# Altium PCB E-pico.PcbDoc
Units mil, origin at the board's own origin, x right, y up, seen from the top; angles counter-clockwise.
Board outline 2065 x 820 mil, 2 copper layers (Top Layer, Bottom Layer); 31 components, 39 nets, 175 pads, 47 vias.
Unrouted connection lines stored in the file: 34.
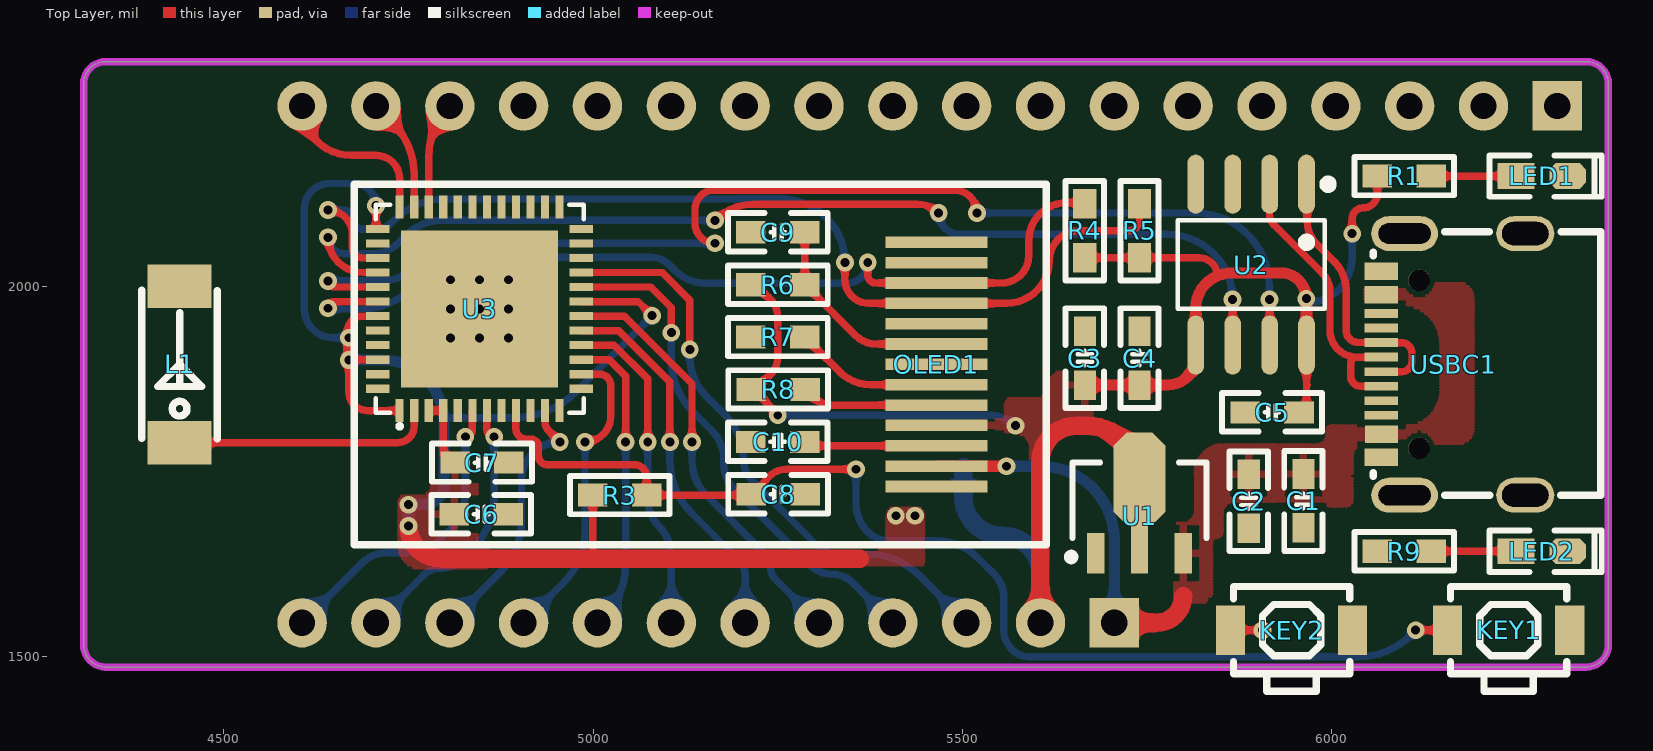
[diagram p0: Top Layer view]
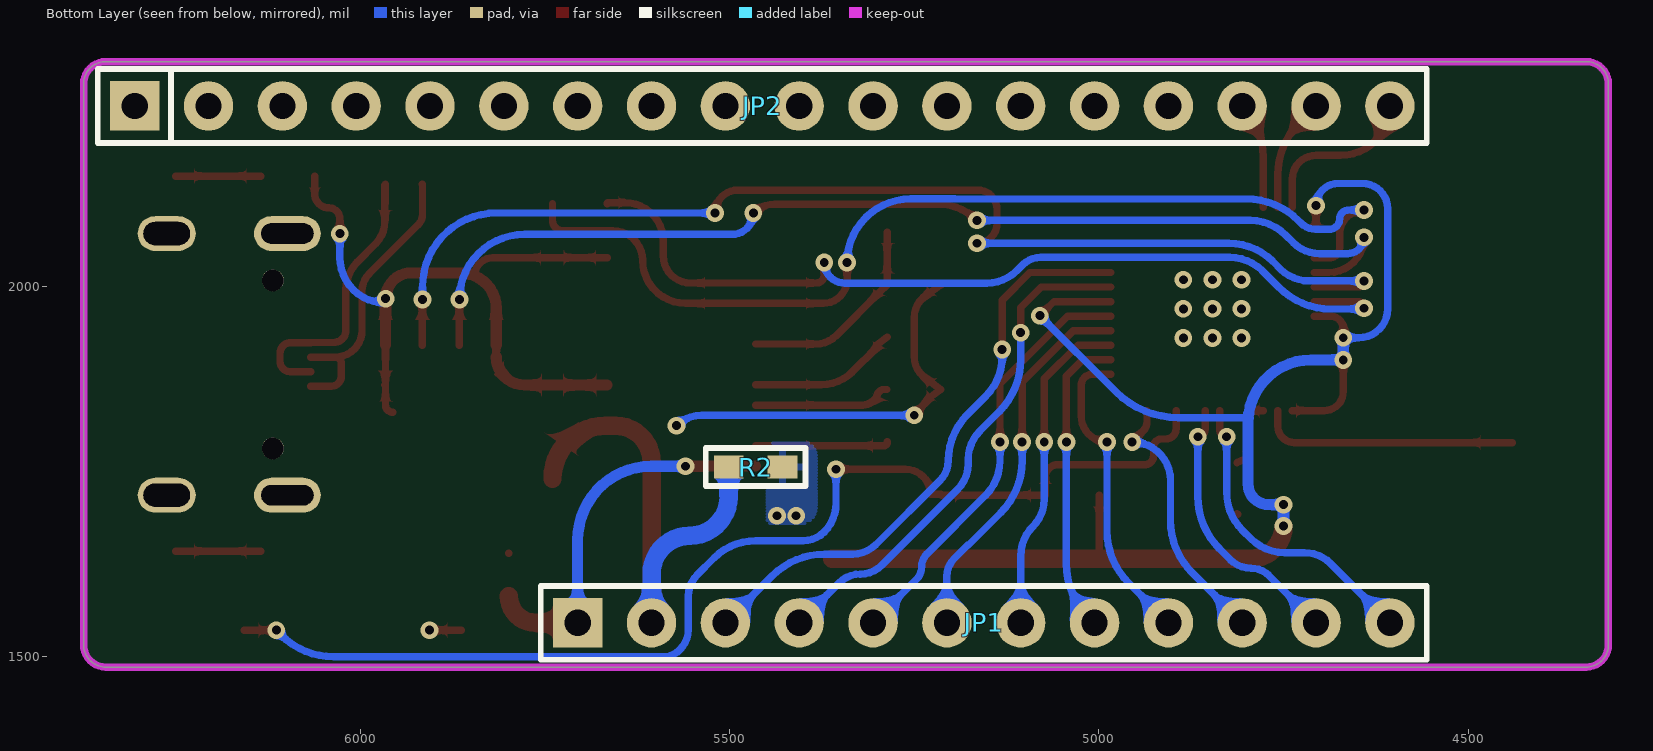
[diagram p1: Bottom Layer view, seen from below]

## Layer stack, top to bottom
Top Solder: solder mask 0.4, Solder Resist, Dk 3.5
Top Layer: signal copper 1.4
Dielectric 1: dielectric 12.6, FR-4, Dk 4.8
Bottom Layer: signal copper 1.4
Bottom Solder: solder mask 0.4, Solder Resist, Dk 3.5

## Board outline
4310,1515 4310,2275 cw(c4340,2275) 4340,2305 6345,2305 cw(c6345,2275) 6375,2275 6375,1515 cw(c6345,1515) 6345,1485 4340,1485 cw(c4340,1515)

## Design rules (kind name [scope] priority, off if disabled: settings)
Clearance usbc [InNet('VBUS')] p1: gap=6 ignorepadtopadclearanceinfootprint=TRUE except(10: Arc-Fill Arc-Poly Arc-Region Track-Fill Track-Poly Track-Region SMDPad-Fill SMDPad-Poly SMDPad-Region Via-Fill Via-Poly Via-Region Fill-Fill Fill-Poly Fill-Region Poly-Poly Poly-Region Region-Region)
Clearance [All] p2: gap=6 ignorepadtopadclearanceinfootprint=TRUE except(10: Arc-Fill Arc-Poly Arc-Region Track-Fill Track-Poly Track-Region SMDPad-Fill SMDPad-Poly SMDPad-Region THPad-Fill THPad-Poly THPad-Region Via-Fill Via-Poly Via-Region Fill-Fill Fill-Poly Fill-Region Poly-Poly Poly-Region Region-Region)
PolygonConnect "for usbc" [HasFootprint('USB-C-SMD_16P')] p1: connectstyle=Direct reliefconductorwidth=20 reliefentries=4 polygonreliefangle="90 Angle" airgapwidth=10
PolygonConnect [All] p2: thpad.connectstyle=Relief thpad.reliefconductorwidth=20 thpad.reliefentries=4 thpad.polygonreliefangle="90 Angle" thpad.airgapwidth=10 smdpad.connectstyle=Relief smdpad.reliefconductorwidth=10 smdpad.reliefentries=4 smdpad.polygonreliefangle="90 Angle" smdpad.airgapwidth=10 via.connectstyle=Direct via.reliefconductorwidth=10 via.reliefentries=4 via.polygonreliefangle="90 Angle" via.airgapwidth=10
RoomDefinition E-pico [InComponentClass('E-pico')] p1: confinementstyle=ConfineIn formatcopy=TRUE lockcomponents=FALSE outline 0,0 2000,0 2000,1000 0,1000
RoutingVias [All] p1: holewidth=28 width=50 viastyle="Through Hole" minholewidth=28 minwidth=50 maxholewidth=28 maxwidth=50
SilkToSilkClearance [All] p1: silktosilkclearance=2
SilkToSolderMaskClearance [IsPad] p1: minsilkscreentomaskgap=2 clearancetoexposedcopper=TRUE
SolderMaskExpansion [All] p1: expansion=2.5 istentingtop=FALSE
Width [All] p1: maxlimit=100 minlimit=6 preferedwidth=10
28 further rules are at their usual default settings.

## Components (designator, comment, footprint, x,y, rotation, side; value= is the part's Value field where it differs from the comment)
C1 "10uf" C0603_M 5962,1710 r270 top locked
C2 "0.1uf" C0603_M 5888,1709.5 r270 top locked
C3 "10uf" C0603_M 5666,1903.5 r90 top locked
C4 "0.1uf" C0603_M 5740,1903.5 r90 top locked
C5 "104" C0603_M 5919.5,1830 r0 top locked
C6 "10uf" C0603_M 4848.5,1692 r180 top locked
C7 "0.1uf" C0603_M 4849.5,1762 r180 top locked
C8 "0.1uf" C0603_M 5250.5,1719 r180 top
C9 "10uf" C0603_M 5250.25,2074 r0 top
C10 "10uf" C0603_M 5250,1790 r0 top
JP1 "HDR-1X12" HDR2.54-LI-12P 5155.87,1545 r180 bottom locked
JP2 "HDR-1X18" HDR2.54-LI-18P 5455.87,2245 r180 bottom locked
KEY1 "Reset" SW-SMD_ST-1186S 6240,1535 r90 top locked
KEY2 "IO0" SW-SMD_ST-1186S 5946,1535 r90 top locked
L1 "AN2051-245" ANT2051 4440,1895 r90 top locked
LED1 "power" LED0603_Y 6285,2150 r0 top locked
LED2 "User" LED0603_Y 6285,1642 r0 top locked
OLED1 "OLED 12880" 0.78'OLED-12880-13PIN-SHORT 5465,1895 r90 top locked
R1 "10k" R0603_M 6098.5,2150 r0 top locked
R2 "0R" R0603_M 5465,1756 r180 bottom
R3 "10k" R0603_M 5036,1718 r0 top
R4 "10k" R0603_M 5666,2076 r90 top locked
R5 "10k" R0603_M 5740,2076 r90 top locked
R6 "10k" R0603_M 5250.25,2003 r0 top
R7 "560k" R0603_M 5250.25,1932 r0 top
R8 "4.7k" R0603_M 5250.5,1861 r0 top
R9 "10k" R0603_M 6098.5,1642 r0 top locked
U1 "LM1117F-3.3" SOT89-150P410X160-3N 5740,1710 r90 top locked
U2 "CH340N" SOP-8_L5.0-W4.0-P1.27-LS6.0-BL 5892,2030 r180 top locked
U3 "ESP32-PICO-D4" QFN-48_L7.0-W7.0-P0.50-BL-EP5.4 4846.27,1970.21 r0 top locked
USBC1 "TYPE-C 2.0 -16P" USB-C-SMD_16P 6165,1895 r270 top locked

## Footprints (in the part's own frame and the unit in brackets; to place one, negate y for a bottom-side part, rotate by r counter-clockwise, add the part's x,y. Pads: shape width x height; smd on the part's side, far side on the other; paste and mask are expansions set on the pad)
0.78'OLED-12880-13PIN-SHORT [mm]
  rect 0.4x3.5 smd: 1(-4.2,0) 1(-4.2,0) 2(-3.5,0) 3(-2.8,0) 4(-2.1,0) 5(-1.4,0) 6(-0.7,0) 7(0,0) 8(0.7,0) 9(1.4,0) 10(2.1,0) 11(2.8,0) 12(3.5,0) 13(4.2,0)
  silkscreen extent -6.2,-3.77 6.2,20.03
ANT2051 [mm]
  rect 1.5x2.2 smd: 1(-2.69,0) 2(2.69,0)
  silkscreen extent -2.56,-1.3 2.55,1.3, body extent -2.61,-1 2.59,1, height 1.2
C0603_M [mil] "贴片MLCC电容"
  rect 40x30 smd: 1(-36.5,0) 2(36.5,0)
  silkscreen extent -68,-26 68,26, body extent -31,-16 32,16, height 33
HDR2.54-LI-12P [mm] "排针，13脚"
  rect 1.7x1.7 hole 0.9: 1(-13.97,0)
  round 1.7 hole 0.9: 2(-11.43,0) 3(-8.89,0) 4(-6.35,0) 5(-3.81,0) 6(-1.27,0) 7(1.27,0) 8(3.81,0) 9(6.35,0) 10(8.89,0) 11(11.43,0) 12(13.97,0)
  silkscreen extent -15.24,-1.27 15.24,1.27, body extent -15.24,-1.27 15.24,1.27, height 2.54
HDR2.54-LI-18P [mm] "排针，18脚"
  rect 1.7x1.7 hole 0.9: 1(-21.59,0)
  round 1.7 hole 0.9: 2(-19.05,0) 3(-16.51,0) 4(-13.97,0) 5(-11.43,0) 6(-8.89,0) 7(-6.35,0) 8(-3.81,0) 9(-1.27,0) 10(1.27,0) 11(3.81,0) 12(6.35,0) 13(8.89,0) 14(11.43,0) 15(13.97,0) 16(16.51,0) 17(19.05,0) 18(21.59,0)
  silkscreen extent -22.86,-1.27 22.86,1.27, body extent -22.86,-1.27 22.86,1.27, height 2.54
LED0603_Y [mil] "黄色0603LED"
  rect 50x35 smd: 1(-35,0)
  oct 50x35 smd: 2(35,0)
  silkscreen extent -71,-28 81,28, body extent -32,-16 31,16, height 18
QFN-48_L7.0-W7.0-P0.50-BL-EP5.4 [mm]
  rect 0.28x0.8 smd: 1(-2.75,-3.5) 2(-2.25,-3.5) 3(-1.75,-3.5) 4(-1.25,-3.5) 5(-0.75,-3.5) 6(-0.25,-3.5) 7(0.25,-3.5) 8(0.75,-3.5) 9(1.25,-3.5) 10(1.75,-3.5) 11(2.25,-3.5) 12(2.75,-3.5) 25(2.75,3.5) 26(2.25,3.5) 27(1.75,3.5) 28(1.25,3.5) 29(0.75,3.5) 30(0.25,3.5) 31(-0.25,3.5) 32(-0.75,3.5) 33(-1.25,3.5) 34(-1.75,3.5) 35(-2.25,3.5) 36(-2.75,3.5)
  rect 0.8x0.28 smd: 13(3.5,-2.75) 14(3.5,-2.25) 15(3.5,-1.75) 16(3.5,-1.25) 17(3.5,-0.75) 18(3.5,-0.25) 19(3.5,0.25) 20(3.5,0.75) 21(3.5,1.25) 22(3.5,1.75) 23(3.5,2.25) 24(3.5,2.75) 37(-3.5,2.75) 38(-3.5,2.25) 39(-3.5,1.75) 40(-3.5,1.25) 41(-3.5,0.75) 42(-3.5,0.25) 43(-3.5,-0.25) 44(-3.5,-0.75) 45(-3.5,-1.25) 46(-3.5,-1.75) 47(-3.5,-2.25) 48(-3.5,-2.75)
  rect 5.4x5.4 smd: 49(0,0)
  silkscreen extent -3.58,-4.11 3.58,3.58, body extent -3.51,-3.51 3.51,3.51, height 0.9
R0603_M [mil] "1/10W贴片电阻"
  rect 40x31.5 smd: 1(-36.5,0) 2(36.5,0)
  silkscreen extent -68,-26 68,26, body extent -31,-16 32,16, height 16
SOP-8_L5.0-W4.0-P1.27-LS6.0-BL [mil]
  oval 22.6x80.14 smd: 1(-74.2,-108.97) 2(-24.2,-108.97) 3(25.8,-108.97) 4(75.8,-108.97) 5(75.8,108.97) 6(25.8,108.97) 7(-24.2,108.97) 8(-74.2,108.97)
  silkscreen extent -109,-115 100,60, body extent -99,-122 99,122, height 59
SOT89-150P410X160-3N [mm] "SOT89, 3-Leads, Body 4.50x2.45mm, Pitch 1.50mm, Lead Span 4.1mm, IPC Medium Density"
  rect 1.4x0.6 smd: 1(-1.8,1.5) 3(-1.8,-1.5)
  rect 1.8x0.6 smd: 2(-1.6,0)
  oct 3.175x1.778 smd: 2(0.762,0)
  silkscreen extent -2.05,-2.3 1.32,2.47, body extent -2.24,-2.15 1.86,2.15, height 1.61
SW-SMD_ST-1186S [mm]
  rect 1.7x1 smd: 1(0,2.1) 2(0,-2.1)
  silkscreen extent -2.1,-2 1.5,2, body extent -2.11,-2.51 1.49,2.49, height 1.55
USB-C-SMD_16P [mm] "封装库来自淘宝ID:黄晶宝石"
  oval 1.2x2 hole 0.8 slot 1.6 at 90 deg: 0(-4.5,2.475) 0(4.5,2.475)
  oval 1.2x2.3 hole 0.7 slot 1.8 at 90 deg: 0(-4.5,-1.675) 0(4.5,-1.675)
  rect 0.3x1.15 smd: A1(3.35,-2.473) A4(2.55,-2.471) A5(1.25,-2.475) A6(0.25,-2.475) A7(-0.25,-2.473) A9(-2.55,-2.475) A12(-3.35,-2.475) B1(-3.05,-2.475) B4(-2.25,-2.475) B5(-1.75,-2.475) B6(-0.75,-2.475) B7(0.75,-2.473) B9(2.25,-2.471) B12(3.05,-2.473)
  rect 0.3x1.148 smd: A8(1.75,-2.475) B8(-1.25,-2.475)
  round 0.75 hole 0.75 unplated: ""(-2.89,-1.175) ""(2.89,-1.175)
  silkscreen extent -4.56,-2.75 4.5,5.08, body extent -4.45,-2.87 4.49,5.03, height 3.25

## Part data
C1 C2 C3 C4 C5 C6 C7 C8 C9 C10: library part C, "贴片电容/MLCC电容", BOM名称=无极性贴片电容, 联系卖家，免费查找封装=唯一出售店铺网址https://shop463601444.taobao.com
JP1: library part "Header 12", "12P接插件", BOM名称=12P接插件, 封装库来自淘宝卖家ID:黄晶宝石=其他店铺购入均为盗版假冒封装库，请立即申请退款，本店现金奖励20~200元, 联系卖家，免费查找封装=唯一出售店铺网址https://shop463601444.taobao.com
JP2: library part "Header 18", "18P接插件", BOM名称=18P接插件, 封装库来自淘宝卖家ID:黄晶宝石=其他店铺购入均为盗版假冒封装库，请立即申请退款，本店现金奖励20~200元, 联系卖家，免费查找封装=唯一出售店铺网址https://shop463601444.taobao.com
KEY1 KEY2: library part 侧按小龟ST-1186S, "C589199"
LED1 LED2: library part LED-SMD, "贴片LED", BOM名称=贴片LED, 封装库来自淘宝卖家ID：黄晶宝石=其他店铺购入均为盗版封装库，请立即申请退款，本店现金奖励20~200元
OLED1: library part 0.78寸12880oled
R1 R2 R3 R4 R5 R6 R7 R8 R9: library part R, "贴片电阻", BOM名称=贴片电阻, 联系卖家，免费查找封装=唯一出售店铺网址https://shop463601444.taobao.com
USBC1: library part USB2.0_Type-C_16Pin, "USB2.0_Type-C_16Pin母座", 联系卖家 免费技术支持=封装库来自淘宝卖家ID：黄晶宝石

## Via types
v1: diameter 24, hole 12, Top Layer to Bottom Layer, tented both sides, 38 vias
v2: diameter 24.02, hole 12, Top Layer to Bottom Layer, 9 vias

## Nets (pads, with @x,y where several pads share a name; then routed paths per layer and width w, separated by ;. In a path a pad name is that pad's centre, name@x,y a point inside that pad or via, vN(x,y) a via of type N, cw(c..) or ccw(c..) an arc to the next point about the centre after c; other vN are vias at no path point)
DN: U2.2 USBC1.A7 USBC1.B7 | length 399.8
  Top Layer w10: U2.2 5916,2138.76 5916,2098 ccw(c5935.31,2098) 5921.66,2084.34 5988,2018 cw(c5963.86,1993.86) 5998,1993.86 5998,1941 ccw(c6034.16,1941) 6034.16,1904.84 ; USBC1.B7 6039.53,1865.47 cw(c6039.53,1879) 6026,1879 6026,1896.69 cw(c6034.16,1896.69) 6034.16,1904.84 ; USBC1.A7 6034.16,1904.84
DP: U2.1 USBC1.A6 USBC1.B6 | length 408.7
  Top Layer w10: U2.1@5966.2,2113.22 U2.1 cw(c5964.28,2137.04) 5967,2137.04 5967,2089 ccw(c6010.46,2089) 5979.73,2058.27 6004,2034 cw(c5965.9,1995.9) 6019.78,1995.9 6019.78,1941.22 ccw(c6036.43,1941.22) 6036.43,1924.57 6067.53,1924.57 6094.47,1924.53 cw(c6094.47,1910) 6109,1910 6109,1899 cw(c6095.16,1899) 6095.16,1885.16 USBC1.A6
EN: C8.2 KEY1.1 R3.2 U3.9 | length 1563.1
  Top Layer w10: U3.9 4895.48,1807.64 ccw(c4909.13,1807.64) 4909.13,1794 4915,1794 cw(c4915,1783) 4926,1783 4926,1771 ccw(c4938,1771) 4938,1759 5056,1759 cw(c5056,1742.5) 5072.5,1742.5 R3.2 5213,1718 ccw(c5213,1719) C8.2 5228,1719 cw(c5262,1719) 5262,1753 v1(5356,1753) ; v1(6114,1535) KEY1.1
  Bottom Layer w10: v1(5356,1753) 5356,1706.97 ccw(c5411.42,1706.97) 5372.2,1667.82 ccw(c5400.32,1695.87) 5400.32,1656.15 ; 5400.37,1656.15 5464.71,1656.15 cw(c5464.71,1576.13) 5521.29,1632.71 5544,1610 cw(c5515.03,1581.03) 5556,1581.03 5556,1536 ccw(c5594.63,1536) 5567.26,1508.74 5567.3,1508.7 cw(c5560.3,1501.56) 5567.37,1508.63 5567.93,1508.07 ccw(c5589.73,1529.73) 5589.73,1499 6036.58,1499 ccw(c6036.58,1599) 6107.29,1528.29 v1(6114,1535)
GND: C1.2 C2.2 C3.2 C4.2 C5.1 C6.1 C7.1 C8.1 C9.1 C10.1 JP2.1 KEY1.2 KEY2.2 LED1.2 LED2.2 OLED1.7 OLED1.9 OLED1.12 R7.1 U1.1 U2.3 U3.49 USBC1.0 USBC1.A1 USBC1.A12 USBC1.B1 USBC1.B12
  other v2: 4806.9,1930.84 4846.27,1930.84 4885.64,1930.84 4806.9,1970.22 4846.27,1970.22 4885.64,1970.22 4806.91,2009.59 4846.27,2009.59 4885.65,2009.59
IO0: KEY2.1 U3.23 | length 43.3
  Top Layer w10: KEY2.1 v1(5906.63,1535)
IO5: JP2.16 U3.34 | length 144.6
  Top Layer w10: U3.34 4777.37,2176.19 cw(c4874.69,2176.19) JP2.16
IO6: JP2.13 U3.31
IO7: JP2.14 U3.32
IO8: JP2.15 U3.33
IO9: JP2.10 U3.28
IO10: JP2.11 U3.29
IO11: JP2.12 U3.30
IO12: JP1.5 U3.18 | length 577.9
  Top Layer w10: U3.18 5042.44,1960.38 5134,1868.82 v1(5134,1790)
  Bottom Layer w10: v1(5134,1790) 5134,1764.47 ccw(c5199.72,1764.47) 5153.25,1718 5232.69,1638.56 cw(c5215.25,1621) 5240,1621.03 ccw(c5264.45,1621) 5247.2,1603.67 JP1.5
IO13: JP1.4 U3.20 | length 692.2
  Top Layer w10: U3.20 5078.25,1999.75 5106,1972 v1(5106,1938)
  Bottom Layer w10: v1(5106,1938) 5106,1901.42 ccw(c5206,1901.42) 5135.29,1830.71 5161,1805 cw(c5122.37,1766.37) 5177,1766.37 5177,1760 ccw(c5225.28,1760) 5191.14,1725.86 5293.93,1623.07 ccw(c5323,1652.04) 5323,1611 cw(c5323,1570.26) 5351.83,1599.04 5351.87,1599 JP1.4
IO14: JP1.6 U3.17 | length 512.1
  Top Layer w10: U3.17 5034.97,1940.69 5104,1871.66 v1(5104,1790)
  Bottom Layer w10: v1(5104,1790) 5104,1764.42 ccw(c5204,1764.42) 5133.29,1693.71 5176.58,1650.42 cw(c5176.58,1648) 5178.29,1649.71 5196,1632 cw(c5172.16,1608.16) 5205.87,1608.16 JP1.6
IO15: JP1.3 U3.21 | length 815.7
  Top Layer w10: U3.21 5093.57,2019.43 5131,1982 v1(5131,1915)
  Bottom Layer w10: v1(5131,1915) 5131,1905.11 ccw(c5206.11,1905.11) 5153,1852 5178.14,1826.87 cw(c5115.69,1764.42) 5204,1764.42 ccw(c5241.23,1764.42) 5214.85,1738.15 5214.9,1738.1 cw(c5207.89,1730.97) 5214.96,1738.04 5301.94,1651.06 ccw(c5333.38,1682.38) 5333.45,1638 5371.45,1638 cw(c5371.45,1538) 5442.16,1608.71 JP1.3 cw(c5505.87,1568.59) JP1.3@5489.2,1551.9
IO17: JP2.9 U3.27
IO18: JP2.17 U3.35 | length 154.2
  Top Layer w10: JP2.17 4728.4,2222.47 cw(c4657.69,2151.76) 4757.69,2151.76 U3.35
IO21: OLED1.11 R4.2 U3.42 | length 1241.1
  Top Layer w10: v1(4641,1971) cw(c4650.06,1971) 4650.06,1980.06 U3.42 ; v1(5372,2033) 5372,2016 ccw(c5382.76,2016) 5382.76,2005.24 5553.24,2005.24 ccw(c5553.24,2042) 5590,2042 5590,2062 cw(c5642,2062) 5642,2114 5664.5,2114 cw(c5664.5,2112.5) R4.2
  Bottom Layer w10: v1(4641,1971) ccw(c4643.41,1973.41) 4643.41,1970 4685.58,1970 ccw(c4685.58,2070) 4756.29,1999.29 4778.62,2021.62 cw(c4823,1977.23) 4823,2040 5079,2040 cw(c5079,2006.2) 5102.9,2030.1 5111,2022 ccw(c5152.04,2063.04) 5152.04,2005 5344,2005 ccw(c5344,2033) v1(5372,2033)
IO22: OLED1.10 R5.2 U3.39 | length 1414.8
  Top Layer w10: v1(4641,2104) cw(c4641,2071) 4674,2071 4674,2053 ccw(c4687.88,2053) 4687.88,2039.12 U3.39 ; v1(5341,2033) 5341,2010 ccw(c5373.32,2010) 5373.32,1977.68 OLED1.10 5559.68,1977.68 ccw(c5559.68,2036) 5618,2036 cw(c5658,2036) 5658,2076 5726,2076 ccw(c5726,2090) 5740,2090 R5.2
  Bottom Layer w10: v1(4641,2104) 4662,2104 cw(c4662,2092) 4674,2092 ccw(c4688,2092) 4688,2078 4706.69,2078 ccw(c4706.69,2105.31) 4725.99,2085.99 4729.71,2089.71 cw(c4800.42,2019) 4800.42,2119 4813,2119 5195.37,2119.09 5254.91,2119.09 cw(c5254.91,2033) v1(5341,2033)
IO23: JP2.18 U3.36 | length 226.6
  Top Layer w10: JP2.18 ccw(c4672.87,2245) 4672.87,2178 4706,2178 cw(c4706,2146) 4738,2146 U3.36
IO25: JP1.9 U3.14 | length 420
  Top Layer w10: U3.14 5008.36,1881.64 cw(c5008.36,1866) 5024,1866 5024,1825 cw(c4989,1825) v1(4989,1790)
  Bottom Layer w10: JP1.9 4959.71,1598.84 ccw(c4889,1669.55) 4989,1669.55 v1(4989,1790)
IO26: JP1.8 U3.15 | length 414.7
  Top Layer w10: U3.15 5021.68,1901.32 5044,1879 v1(5044,1790)
  Bottom Layer w10: JP1.8 5014.71,1553.84 ccw(c4944,1624.55) 5044,1624.55 v1(5044,1790)
IO27: JP1.7 U3.16 | length 447.7
  Top Layer w10: U3.16 5028.32,1921.01 5074,1875.32 v1(5074,1790)
  Bottom Layer w10: v1(5074,1790) 5074,1712.21 ccw(c5125.21,1712.21) 5089,1676 cw(c5048.26,1635.26) 5105.87,1635.26 JP1.7
IO35: JP1.10 U3.11 | length 374.5
  Top Layer w10: U3.11 4934.85,1817.25 ccw(c4951.99,1817.25) 4939.87,1805.13 v1(4955,1790)
  Bottom Layer w10: JP1.10@4805.87,1558.87 JP1.10 4873.71,1612.84 ccw(c4803,1683.55) 4903,1683.55 4903,1738 cw(c4955,1738) v1(4955,1790)
IO37: JP1.12 U3.6 | length 419.8
  Top Layer w10: v1(4827,1797) ccw(c4827,1806.43) 4836.43,1806.43 U3.6
  Bottom Layer w10: JP1.12 4685.93,1625.06 cw(c4722,1589) 4722,1640 4748.53,1640 ccw(c4748.53,1704.31) 4794,1658.83 4805.67,1670.5 ccw(c4754.17,1722) 4827,1722 v1(4827,1797)
IO38: JP1.11 U3.7 | length 369.8
  Top Layer w10: U3.7 4856.11,1806.89 ccw(c4866,1806.89) v1(4866,1797)
  Bottom Layer w10: JP1.11 4769.88,1609.01 cw(c4794,1584.9) 4794,1619 ccw(c4794,1658.83) 4822.17,1630.67 4836.71,1645.21 ccw(c4766,1715.92) 4866,1715.92 v1(4866,1797)
NetC9_2: C9.2 OLED1.8 R6.2 | length 280.9
  Top Layer w10: C9.2 R6.2 5297.5,1992.25 5355.95,1933.8 ccw(c5383.02,1960.77) 5383.04,1922.56 ; 5383.08,1922.56 OLED1.8
NetC10_2: C10.2 OLED1.3 | length 181.5
  Top Layer w10: C10.2 ccw(c5291.74,1790) 5291.74,1784.76 OLED1.3
NetL1_1: L1.1 U3.2 | length 351.5
  Top Layer w10: L1.1 4735.48,1789.09 ccw(c4735.48,1811.31) 4757.69,1811.31 U3.2
NetLED1_1: LED1.1 R1.2 | length 115
  Top Layer w10: R1.2 LED1.1
NetLED2_1: LED2.1 R9.2 | length 115
  Top Layer w10: R9.2 LED2.1
NetOLED1_5: OLED1.5 R8.2 | length 187.3
  Top Layer w10: R8.2 5292.9,1861 5295.1,1859.83 cw(c5290.41,1851) 5299.87,1854.25 ccw(c5319.88,1861) 5319.88,1839.88 OLED1.5
NetOLED1_6: OLED1.6 R7.2 | length 203.7
  Top Layer w10: R7.2 5301.01,1921.25 5301.01,1917.74 5333.95,1884.8 cw(c5326.88,1877.73) 5334.03,1884.72 ccw(c5375.79,1926.54) 5375.81,1867.44 ; 5375.85,1867.44 OLED1.6
USB-UART_RX: U2.7 U3.41 | length 1619.5
  Top Layer w10: v1(4641,2008) ccw(c4649.25,2008) 4649.25,1999.75 U3.41 ; v1(5165,2059) cw(c5165,2086) 5138,2086 5138,2105 cw(c5164,2105) 5164,2131 5489,2131 cw(c5489,2100) v1(5520,2100) ; v1(5916,1983) 5916.2,1983 U2.7
  Bottom Layer w10: v1(4641,2008) 4715.37,2008 ccw(c4715.37,2062.63) 4754,2024 4764.25,2034.25 cw(c4824,1974.5) 4824,2059 v1(5165,2059) ; v1(5520,2100) 5816,2100 cw(c5816,2000) 5916,2000 v1(5916,1983)
USB-UART_TX: U2.6 U3.40 | length 1483.7
  Top Layer w10: v1(4641,2067) ccw(c4688.57,2067) 4688.57,2019.43 U3.40 ; v1(5165,2090) cw(c5218.11,2036.89) 5218.11,2112 5439.03,2112 cw(c5439.03,2071.03) v1(5468,2100) ; v1(5866,1983) 5866.2,1983 U2.6
  Bottom Layer w10: v1(4641,2067) ccw(c4662.94,2067) 4662.94,2045.06 4700.88,2045.06 ccw(c4700.93,2096.07) 4737,2060 4747.1,2070.1 cw(c4795.14,2022.06) 4795.14,2090 v1(5165,2090) ; v1(5468,2100) ccw(c5497,2100) 5497,2071 5778,2071 cw(c5778,1983) v1(5866,1983)
VBUS: C1.1 C2.1 JP1.1 OLED1.2 U1.3 USBC1.A4 USBC1.A9 USBC1.B4 USBC1.B9 | length 523.9
  Top Layer w10: v1(5560,1757) v1@5560,1757.2 ; U1.3@5799,1639.13 U1.3
  Top Layer w15: OLED1.2 v1@5560,1757.2
  Top Layer w25: JP1.1 5763,1545 ccw(c5763,1581) 5799,1581
  Bottom Layer w15: v1(5560,1757) 5605.87,1757 cw(c5605.87,1657) 5705.87,1657 JP1.1
VCC_3V3: C3.1 C4.1 C5.2 JP1.2 OLED1.4 R1.1 R2.1 R4.1 R5.1 R6.1 R8.1 U1.2 U2.5 U2.8 | length 2274.3
  Top Layer w10: R6.1 5228.41,1992.25 5228.41,1991.43 cw(c5213.75,1958) 5250.25,1958 5250.25,1906 cw(c5214,1906) 5228.73,1872.88 5228.73,1871.75 R8.1 5229,1850.25 v1(5250,1826) ; 5666,1814 ccw(c5668,1814) 5668,1812 ; R4.1 R5.1 5820.75,2039.5 cw(c5820.75,2014.73) 5845.51,2014.73 ; U2.5@5816.2,1893.2 5816.2,1905.2 U2.5 ; C5.2 ccw(c5956,1840.2) 5966.2,1840.2 5966.2,1868 ; v1(5966,1984) v1@5966.2,1984 ; U2.8 5966.2,1868 ; 5967.2,1867 cw(c5967.2,1868) 5966.2,1868 ; v1(6028,2072) 6028,2092 cw(c6043,2092) 6043,2107 ccw(c6043,2126) 6062,2126 R1.1
  Top Layer w15: C3.1 C4.1 5778,1867 ccw(c5778,1905.2) U2.5@5816.2,1905.2 ; U2.5 5816.2,1971.2 cw(c5863.18,1971.2) 5845.51,2014.73 cw(c5867.37,1960.88) 5867.37,2019 5931,2019 cw(c5931,1984) v1(5966,1984) ; U2.8 v1@5966.2,1984
  Top Layer w25: JP1.2 5605.87,1762.87 cw(c5655,1762.87) 5615.55,1792.14 cw(c5655,1762.87) 5655,1812 5668,1812 cw(c5668,1740) U1.2@5740,1740
  Bottom Layer w10: v1(5250,1826) 5538.2,1826 cw(c5538.2,1778.2) v1(5572,1812) ; v1@5966,1978 ccw(c5966,2040) 6028,2040 v1(6028,2072)
  Bottom Layer w25: R2.1 5501.5,1715.5 ccw(c5554,1715.5) 5554,1663 cw(c5554,1611.13) 5605.87,1611.13 JP1.2
VDD: C6.2 C7.2 R2.2 R3.1 U3.1 U3.3 U3.4 U3.19 U3.37 U3.43 U3.46 | length 2290.4
  Top Layer w10: v1(4669,1901) 4669,1858 ccw(c4694.59,1858) 4694.59,1832.41 U3.1 ; v1@4669,1901.32 U3.46 ; v1(4669,1931) 4669,1943 cw(c4686.38,1943) 4686.38,1960.38 U3.43 ; v1(4706,2110) 4706,2080.96 ccw(c4708.47,2080.96) U3.37 ; U3.3 U3.4 4797.06,1821.67 4797.06,1775.44 ccw(c4808.73,1775.44) 4798.65,1769.55 4801.4,1766.8 4801.66,1766.7 4803.24,1766.04 C7.2 ; C6.2 ccw(c4812,1693) C6.2@4813,1693 ; U3.19 5060.87,1980.06 5079.93,1961 v1(5080,1961) ; 4994,1632 ccw(c4994,1637.5) 4999.5,1637.5 R3.1
  Top Layer w15: v1@4669,1901.32 v1(4669,1931)
  Top Layer w25: v1(4750,1676) ccw(c4794,1676) 4794,1632 4994,1632 5361,1632
  Bottom Layer w10: v1(4669,1931) 4648,1931 cw(c4648,1970) 4609,1970 4609,2106 cw(c4643,2106) 4643,2140 4676,2140 cw(c4676,2110) v1(4706,2110) ; 4797.48,1822.93 4892.49,1822.93 ccw(c4892.49,1942.27) 4976.88,1857.88 v1(5080,1961) ; R2.2@5428,1756 R2.2
  Bottom Layer w15: v1(4669,1931) v1(4669,1901) 4713,1901 cw(c4713,1816) 4797.06,1828.59 cw(c4713,1816) 4798,1816 4798,1733 cw(c4770,1733) 4770,1705 v1(4750,1705) v1(4750,1676)
  other v1: 5410,1690 5436,1690
pads on no net: JP2.2 JP2.3 JP2.4 JP2.5 JP2.6 JP2.7 JP2.8 L1.2 OLED1.1 OLED1.13 R9.1 U2.4 U3.5 U3.8 U3.10 U3.12 U3.13 U3.22 U3.24 U3.25 U3.26 U3.38 U3.44 U3.45 U3.47 U3.48 USBC1. USBC1.A5 USBC1.A8 USBC1.B5 USBC1.B8

## Polygon pours and split planes (outlines as drawn)
VCC_3V3 on Top Layer "VCC_3V3_L01_P020" (hatched Horizontal grid 4 track 5, remove dead copper, pour order 20): 5532,1820 5532,1805 5557,1805 cw(c5557,1803) 5559,1803 ccw(c5561,1803) 5561,1801 5574,1801 cw(c5574,1783) 5592,1783 5592,1768 ccw(c5596,1768) 5596,1764 5597,1764 ccw(c5597,1780.5) 5613.5,1780.5 5613.5,1797.5 cw(c5619,1797.5) 5619,1803 5646,1803 ccw(c5646,1812) 5655,1812 cw(c5658.25,1804.16) 5661.5,1812 ccw(c5663.25,1824.75) 5676,1823 5677,1879 ccw(c5669,1879) 5669,1887 5640,1887 ccw(c5640,1863) 5616,1863 cw(c5604,1863) 5604,1851 5571,1851 ccw(c5571,1838) 5558,1838 5558,1825 cw(c5553,1825) 5553,1820
VDD on Top Layer "VDD_L01_P018" (hatched Horizontal grid 4 track 5, remove dead copper, pour order 18): 4737,1708 cw(c4747,1708) 4747,1718 4769,1718 ccw(c4769,1730) 4781,1730 4781,1735 cw(c4795,1735) 4795,1749 4831,1749 cw(c4831,1737) 4843,1737 4843,1655 ccw(c4850,1655) 4850,1648 cw(c4850,1640) 4858,1640 4858,1626 cw(c4850,1626) 4850,1618 4769,1618 cw(c4768.5,1649.5) 4737,1649
VDD on Top Layer "VDD_L01_P013" (hatched Horizontal grid 4 track 5, remove dead copper, pour order 13): 5410,1702 5436,1702 cw(c5436,1690) 5448,1690 5448,1629 cw(c5439,1629) 5439,1620 5368,1620 cw(c5368,1627) 5361,1627 5361,1637 cw(c5367,1637) 5367,1643 5384,1643 ccw(c5382.84,1658.16) 5398.02,1659 5398.02,1689.23 cw(c5410,1690)
VBUS on Top Layer "VBUS_L01_P002" (hatched 90Degree grid 4 track 5, remove dead copper, pour order 2): 6000,1812 ccw(c6000,1806) 5994,1806 5994,1800 cw(c5980,1800) 5980,1786 5849,1786 ccw(c5853.49,1748.5) 5816,1744 5816,1697 cw(c5800,1697) 5800,1681 5793,1681 ccw(c5795.49,1673.5) 5788,1671 5788,1578.99 ccw(c5793.3,1578.33) 5793,1573 5829,1573 ccw(c5830.53,1580.45) 5837.99,1578.99 5838,1655 cw(c5843,1655) 5843,1660 ccw(c5843,1669) 5852,1669 5852,1693 cw(c5869,1693) 5869,1710 5990,1710 cw(c5990.4,1705.4) 5995,1705 ccw(c5997.5,1705.5) 5998,1703 6019,1703 ccw(c6020,1711) 6028,1710 6028,1774 cw(c6042.5,1771.5) 6045,1786 6092,1786 6092,1812
VBUS on Top Layer "VBUS_L01_P000" (hatched Horizontal grid 4 track 5, remove dead copper, pour order 0): 6045,1975 6096,1975 cw(c6096,1923) 6148,1923 6148,1860 cw(c6100,1860) 6100,1812 6045,1812 6045,1786 6168,1786 ccw(c6168,1810) 6192,1810 6192,1983 ccw(c6168,1983) 6168,2007 6045,2007
VDD on Bottom Layer "VDD_L02_P008" (hatched Horizontal grid 4 track 5, remove dead copper, pour order 8): 5449,1686 cw(c5442,1686) 5442,1679 5405,1679 cw(c5405,1701) 5383,1701 5383,1771 cw(c5402,1771) 5402,1790 5434,1790 cw(c5434,1775) 5449,1775 5449,1771

## Keep-outs
Keep-Out Layer:
  the board outline again, w10

## Silkscreen, mask and mechanical layers (free items; w line width, h text height)
Mechanical 1:
  the board outline again, w10